# EAGLE board seb_v1 (EAGLE 7.7.0)
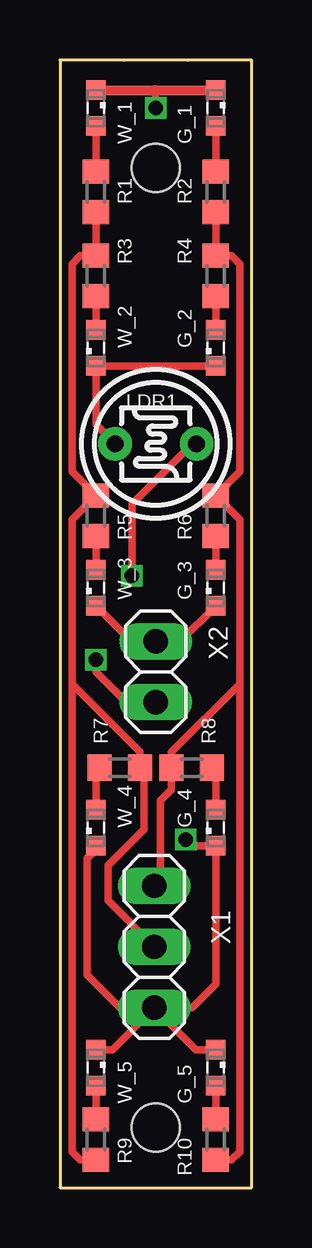
[diagram p0: board, top side]
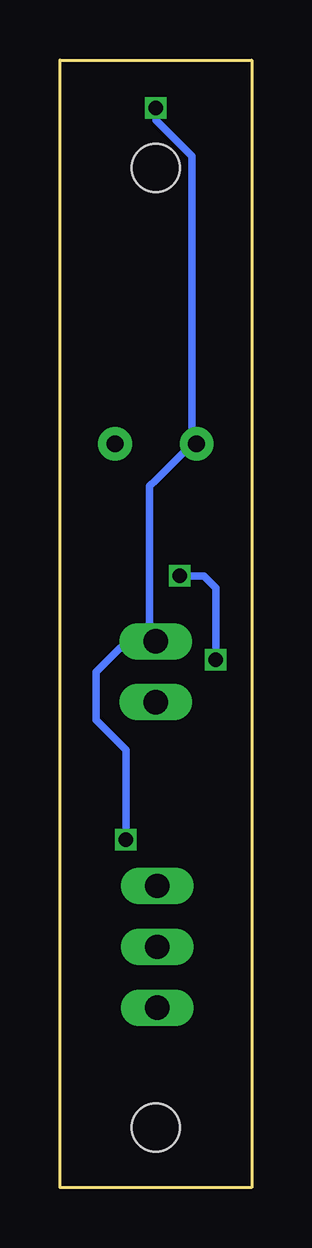
[diagram p1: board, bottom side, seen from below]

Size 8 x 47 mm. Coordinates in mm from the lower left corner, seen from the top.
Outline: 8,0 8,47 arc-1 0,47 0,0 8,0
Copper layers (1*16): Top 0.035mm / dielectric 1.5mm / Bottom 0.035mm
Design rules "SeeedStudio_2layer_DRU_no_angle_20140221": minimum track width 6mil, minimum drill 12mil, track to track 6mil, track to pad 6mil, pad to pad 6mil, via to via 6mil, smd to smd 0mil, copper to edge 10mil, drill to drill 10mil, minimum pad ring 10mil, minimum via ring 6mil, stop-mask expansion 2mil, vias tented up to drill 100mil, thermal gap 10mil
Holes 2 mm at 4,42.5 4,2.5

## Footprints (pad centres in the part's own frame; a part is rotated, then mirrored left to right if it is on the bottom)
SML0603 = smd 0.8 x 0.8: A 0.75,0; C -0.75,0
T0-46-A10XX = drill 0.7 pad 1.4: 1 -1.7,0; 2 1.7,0
R0603 = smd 1 x 1.1: 1 -0.85,0; 2 0.85,0
1X03 = drill 1.016 long: 1 -2.54,0; 2 0,0; 3 2.54,0
1X02 = drill 1.016 long: 1 -1.27,0; 2 1.27,0

## Placement (x,y rotation side)
G_1  [SML0603]  6.5,45 270 top
G_2  [SML0603]  6.5,35 90 top
G_3  [SML0603]  6.5,25 90 top
G_4  [SML0603]  6.5,15 90 top
G_5  [SML0603]  6.5,5 270 top
LDR1  A1050_09  [T0-46-A10XX]  4,31 180 top
R1  [R0603]  1.5,41.5 90 top
R2  [R0603]  6.5,41.5 90 top
R3  [R0603]  1.5,38 270 top
R4  [R0603]  6.5,38 270 top
R5  [R0603]  1.5,28 270 top
R6  [R0603]  6.5,28 270 top
R7  [R0603]  2.5,17.5 180 top
R8  [R0603]  5.5,17.5 0 top
R9  [R0603]  1.5,2 90 top
R10  [R0603]  6.5,2 90 top
W_1  [SML0603]  1.5,45 270 top
W_2  [SML0603]  1.5,35 90 top
W_3  [SML0603]  1.5,25 90 top
W_4  [SML0603]  1.5,15 90 top
W_5  [SML0603]  1.5,5 270 top
X1  [1X03]  3.94,10.03 90 top
X2  [1X02]  4,21.5 90 top

## Library data of the parts
G_1-G_5 W_1-W_5 = led
LDR1 = photo-elements
R1-R10 = rcl
X1 X2 = pinhead

## Nets
G_+: R2.1 R4.1 R6.1 R8.1 R10.1 X1.3
GND: G_1.C G_2.C G_3.C G_4.C G_5.C LDR1.2 W_1.C W_2.C W_3.C W_4.C W_5.C X1.1 X2.2
N$1: G_1.A R2.2
N$2: G_2.A R4.2
N$3: G_3.A R6.2
N$4: G_4.A R8.2
N$5: G_5.A R10.2
N$7: LDR1.1 X2.1
N$9: R1.2 W_1.A
N$10: R3.2 W_2.A
N$11: R5.2 W_3.A
N$12: R7.2 W_4.A
N$13: R9.2 W_5.A
W_+: R1.1 R3.1 R5.1 R7.1 R9.1 X1.2

## Tracks (layer width: path | path; a pad name or v marks a point on that pad's centre or on a via)
G_+
  Top 0.305: R2.1 R4.1 7.15,38.85 7.5,38.5 7.5,29.85 R6.1 7.5,27.85 7.5,21 | 7.5,21 4.65,18.15 R8.1 4.65,16.59 4.19,16.13 4.19,12.83 X1.3 | R10.1 7.15,1.15 7.5,1.5 7.5,21
GND  (via drill 0.6)
  Top 0.305: 3.99,45.75 v4,45 | G_2.C W_2.C 1.5,31.8 LDR1.2 | G_3.C 5.02,22.77 X2.2 2.98,22.77 W_3.C | v5.25,14.5 5.75,14.25 G_4.C 6.5,8.5 5.5,7.5 X1.1 | W_5.C 2.19,5.75 X1.1 | G_5.C 5.68,5.75 X1.1 | X1.1 2.5,7.5 1.14,8.86 1.14,13.72 1.5,14.07 W_4.C
  Top 0.406: X1.1 | W_1.C 3.99,45.75 G_1.C
  Bottom 0.305: v4,45 4,44.5 2.5,43 2.5,42 2.5,31.2 LDR1.2 2.5,31 4,29.5 4.27,29.23 4.27,23.04 X2.2 4.27,22.5 5.5,22.5 6.5,21.5 6.5,19.5 5.25,18.25 v5.25,14.5
N$1
  Top 0.305: R2.2 G_1.A
N$2
  Top 0.305: G_2.A R4.2
N$3
  Top 0.305: G_3.A R6.2
N$4
  Top 0.305: R8.2 6.5,17.35 G_4.A
N$5
  Top 0.305: G_5.A R10.2
N$7  (via drill 0.6)
  Top 0.305: LDR1.1 5.5,31 3,28.5 v3,25.5 | v1.5,22 1.5,21.5 2.77,20.23 3.77,20.23 X2.1
  Bottom 0.305: v1.5,22 1.5,25 2,25.5 v3,25.5
N$9
  Top 0.305: W_1.A R1.2
N$10
  Top 0.305: W_2.A R3.2
N$11
  Top 0.305: W_3.A R5.2
N$12
  Top 0.305: W_4.A 1.5,17 1.65,17.15 R7.2
N$13
  Top 0.305: R9.2 W_5.A
W_+
  Top 0.305: R1.1 R3.1 0.85,38.85 0.5,38.5 0.5,29.85 R5.1 0.5,27.85 0.5,21 | 0.5,21 3.35,18.15 R7.1 3.5,17.5 3.5,16 | X1.2 2,11.97 2,13.43 3.5,14.93 3.5,16 | R9.1 0.85,1.15 0.5,1.5 0.5,21 | 3.5,16 3.5,16.5